# Altium PCB 400236.PcbDoc (part 5 of 7)
Units mm, origin at the board's own origin, x right, y up, seen from the top; angles counter-clockwise.
Board outline 136.53 x 63.5 mm, 4 copper layers (Top Layer, Mid-Layer 1, Mid-Layer 2, Bottom Layer), stack 1.49 mm thick; 344 components, 236 nets, 1364 pads, 1393 vias.
Unrouted connection lines stored in the file: 6.
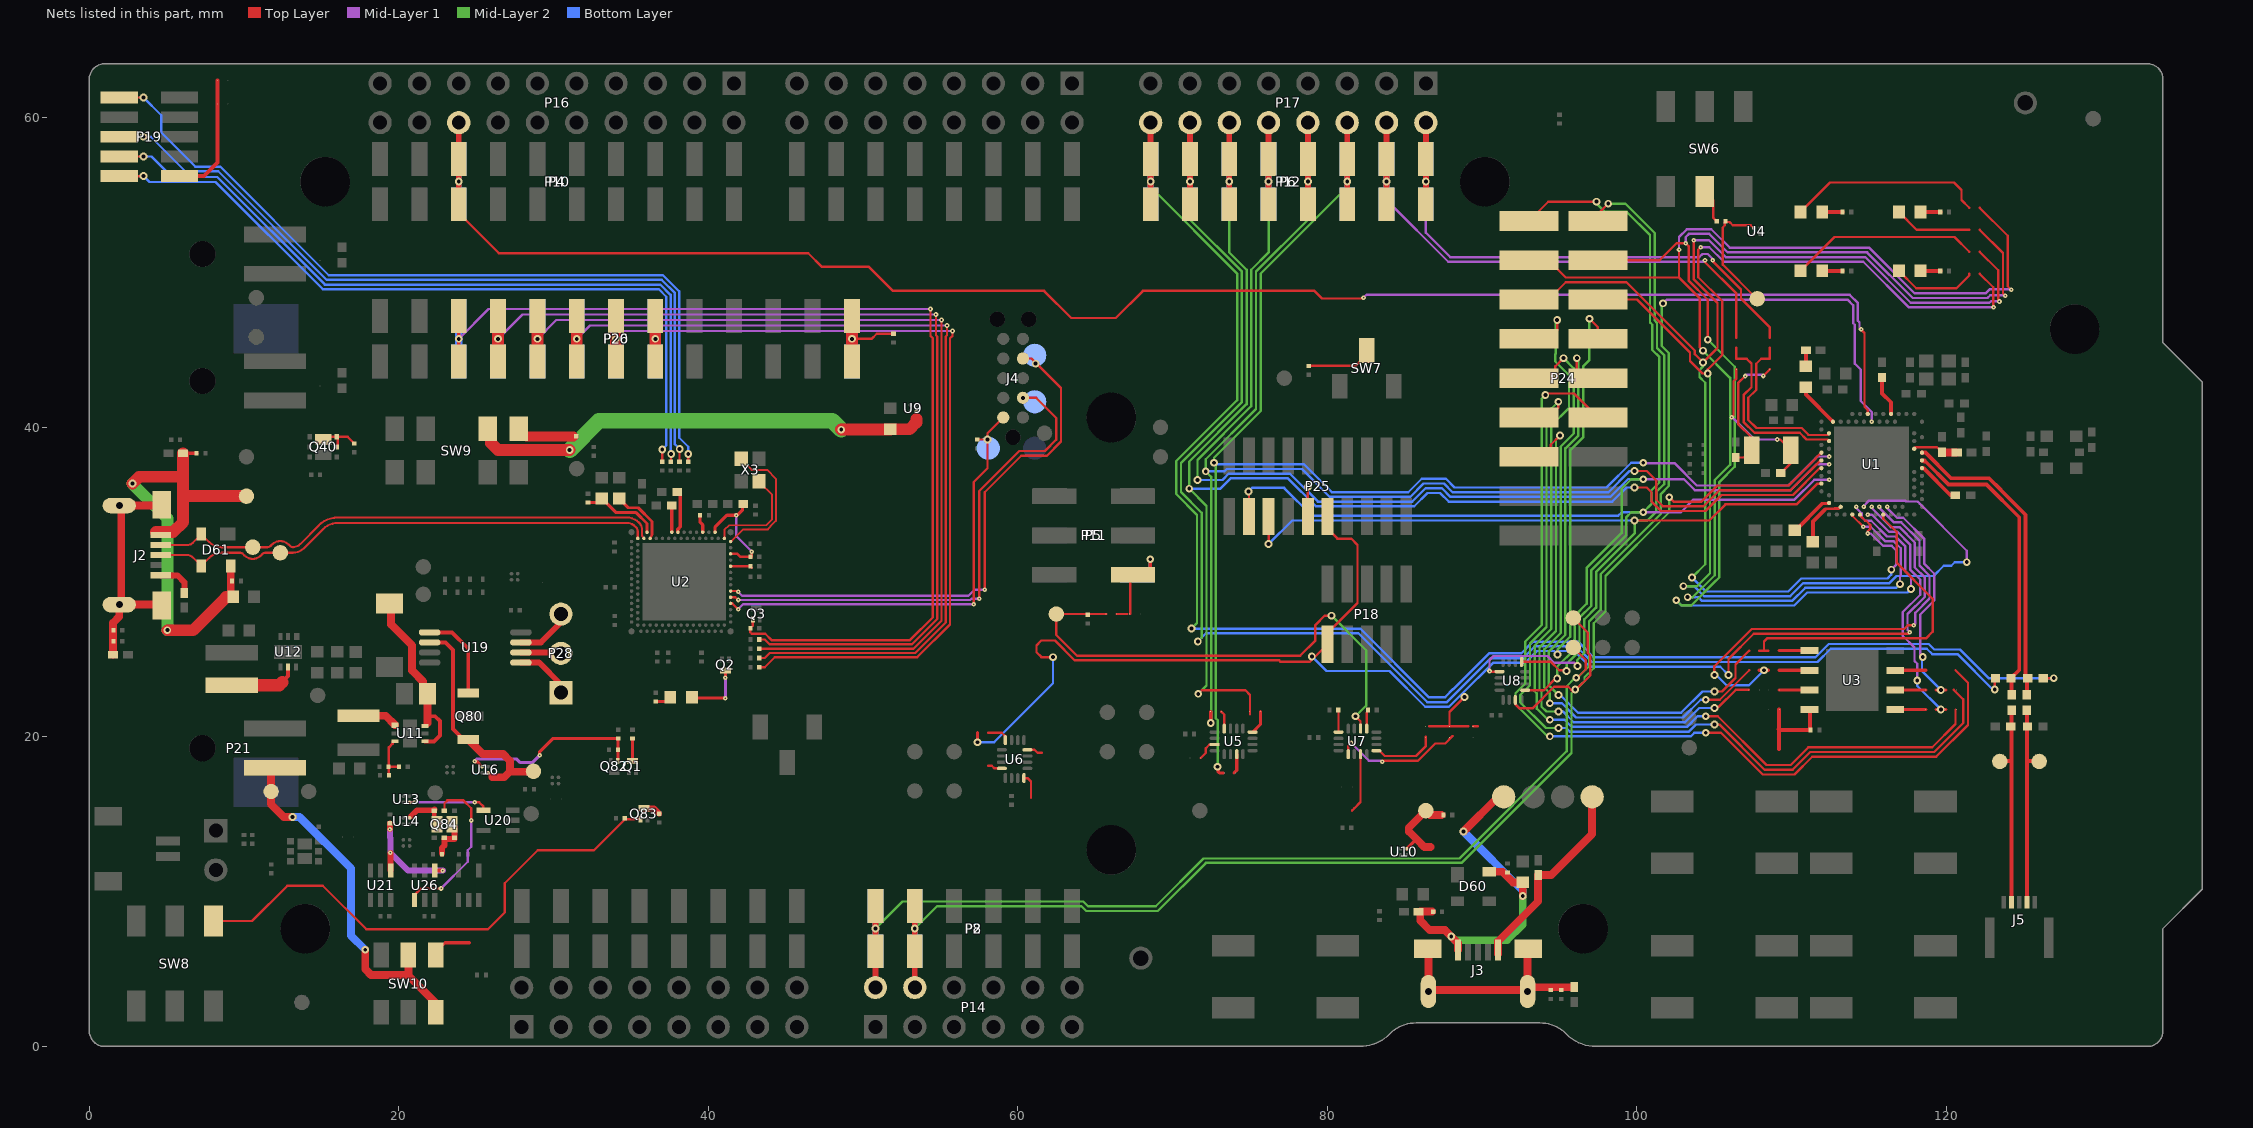
[diagram p5: the nets of this part, all layers, seen from the top]

## Via types
v1: diameter 0.5, hole 0.25, Top Layer to Bottom Layer, tented both sides, 1166 vias
v2: diameter 0.3, hole 0.1, Top Layer to Mid-Layer 1, tented top, 227 vias

## Nets (pads, with @x,y where several pads share a name; then routed paths per layer and width w, separated by ;. In a path a pad name is that pad's centre, name@x,y a point inside that pad or via, vN(x,y) a via of type N, cw(c..) or ccw(c..) an arc to the next point about the centre after c; other vN are vias at no path point) (continued)
IMCU_N: D61.2 J2.2 TP10.1 U2.B4 | length 33.6
  Top Layer w0.138: J2.2@4.619,32.398 6.34,32.398 ccw(c6.34,32.906) 6.699,32.546 D61.2@7.234,33.082 ; D61.2@7.244,33.099 7.248,33.095 7.754,32.59 ccw(c8.552,33.388) 8.552,32.259 11.506,32.259 ccw(c11.506,32.571) 11.727,32.35 11.811,32.434 cw(c12.344,31.901) 12.344,32.655 cw(c12.344,31.897) 12.88,32.433 12.964,32.349 ccw(c13.183,32.568) 13.163,32.259 ccw(c13.153,32.935) 13.631,32.457 14.84,33.666 ; 14.837,33.669 cw(c16.073,32.433) 16.063,34.181 ; U2.B4@35.839,32.827 35.839,32.877 35.714,33.002 35.714,33.379 ccw(c35.035,33.379) 35.515,33.859 ccw(c34.737,33.081) 34.737,34.181 16.073,34.181 ; 16.063,34.181 cw(c16.073,32.433) 16.073,34.181 ; 16.063,34.181 16.073,34.181
IMCU_P: D61.3 J2.3 TP9.1 U2.B2 | length 33.9
  Top Layer w0.138: J2.3@4.619,31.75 6.34,31.75 cw(c6.34,31.242) 6.699,31.601 D61.3@7.244,31.055 7.244,31.062 7.754,31.571 ; 35.275,33.6 ccw(c34.737,33.062) 34.737,33.823 16.063,33.823 ccw(c16.063,32.464) 15.112,33.435 ccw(c16.063,32.464) 15.107,33.43 15.102,33.425 13.884,32.207 cw(c13.147,32.944) 13.147,31.901 11.405,31.901 ccw(c11.405,31.589) 11.184,31.81 11.1,31.726 cw(c10.566,32.259) 10.566,31.505 cw(c10.566,32.263) 10.031,31.727 9.947,31.811 ccw(c9.728,31.592) 9.728,31.901 8.551,31.901 ; 35.276,33.6 35.344,33.532 cw(c35.115,33.303) 35.439,33.303 U2.B2@35.439,32.827 ; 7.754,31.571 cw(c8.551,30.773) 8.551,31.901 ; 7.754,31.571 cw(c8.551,30.773) 8.551,31.901
IMCU_RESET: J4.10 R8.1 TP50.1 U2.AC31 | length 29.6
  Top Layer w0.152: v2(41.925,28.25) U2.AC31@41.548,28.627 ; v2(57.15,28.575) 57.15,36.474 58.033,37.358 v1@58.033,39.218 ; R8.1@57.375,39.21 57.383,39.218 v1@58.033,39.218 ; J4.10@59.055,40.64 58.039,39.624 v1(58.039,39.218) v1@58.033,39.218 ; U2.AC31@41.548,28.627 U2.AC31@41.439,28.627 U2.AC31@41.548,28.627
  Mid-Layer 1 w0.152: v2(41.925,28.25) 42.245,28.57 57.145,28.57 v2(57.15,28.575)
IMCU_SWDCLK: J4.4 TP51.1 U2.W31 | length 36
  Top Layer w0.15: U2.W31@41.439,29.427 41.873,29.427 v2(41.925,29.375)
  Top Layer w0.152: v2(57.861,29.515) 57.861,35.814 60.219,38.172 61.874,38.172 62.786,39.084 62.786,42.547 60.884,44.45 J4.4@60.325,44.45
  Mid-Layer 1 w0.152: v2(41.925,29.375) 42.175,29.125 56.811,29.125 57.201,29.515 v2(57.861,29.515)
  other v1: 61.151,44.12
IMCU_SWDIO: J4.2 TP49.1 U2.AA31 | length 33.9
  Top Layer w0.125: U2.AA31@41.439,29.027 41.748,29.027 v2(41.925,28.85)
  Top Layer w0.15: U2.AA31@41.439,29.027 41.748,29.027
  Top Layer w0.152: v2(57.506,28.931) 57.506,35.89 60.092,38.476 61.751,38.476 62.484,39.209 62.484,40.604 61.178,41.91 v1(60.325,41.91)
  Mid-Layer 1 w0.152: v2(41.925,28.85) 41.927,28.848 56.926,28.848 57.005,28.926 57.026,28.926 57.033,28.933 57.504,28.933 v2(57.506,28.931)
N\R\F\_\O\N\L\Y\: R3.1 TP22.1 U4.B2 | length 8
  Top Layer w0.152: U4.B2@107.544,52.876 107.357,53.063 106.187,53.063 105.98,53.27 105.765,53.27 R3.1@105.72,53.315 105.676,53.27 105.676,53.055 105.537,52.916 105.537,50.516 107.743,48.311 TP22.1@107.772,48.311
NetC3_2: C3.2 L1.1 U1.H23 | length 2.9
  Top Layer w0.145: U1.H23@117.914,38.617 118.019,38.722 119.384,38.722 119.718,38.388 C3.2@119.723,38.383
  Top Layer w0.508: C3.2@119.718,38.388 L1.1@120.612,38.388
NetC9_1: C9.1 U1.N24 | length 2.9
  Top Layer w0.25: U1.N24@118.414,37.367 118.5,37.367 120.25,35.617 C9.1@120.564,35.617
NetC13_1: C13.1 U1.A18 | length 2.6
  Top Layer w0.25: C13.1@115.839,43.217 115.839,42.2 116.414,41.625 U1.A18@116.414,40.867
NetC17_2: C17.2 SB2.1 X2.1 | length 8.3
  Top Layer w0.152: C17.2@106.385,38.05 106.921,38.05 107.421,38.55 107.421,39.34 106.537,40.224 106.537,42.86 v2(106.995,43.317) ; v2@107.02,43.317 v2@107.045,43.291 ; v2(108.153,43.325) SB2.1@108.585,43.757
  Mid-Layer 1 w0.152: v2@107.104,43.401 108.077,43.401 v2(108.153,43.325)
NetC18_2: C18.2 SB1.1 X2.2 | length 9.6
  Top Layer w0.152: v2(106.121,40.665) 106.24,40.784 106.24,42.983 106.426,43.169 SB1.1@106.426,43.757 ; v2(109.068,39.218) 109.254,39.218 109.921,38.55 X2.2@109.921,38.525 109.921,37.675 C18.2@109.298,37.052
  Mid-Layer 1 w0.152: v2@106.147,40.665 107.594,39.218 v2(109.068,39.218)
NetC20_1: C20.1 U1.AC5 | length 3.6
  Top Layer w0.184: C20.1@111.354,32.614 C20.1@111.354,32.617 ; 112.062,34.608 112.202,34.747 112.254,34.747 112.258,34.743 112.749,34.743 112.755,34.749 113.045,34.749 U1.AC5@113.164,34.867
  Top Layer w0.254: C20.1@111.364,32.617 111.364,33.909 112.112,34.657
NetC29_2: C29.2 C30.1 U2.A27 U2.G31 | length 7.5
  Top Layer w0.152: U2.G31@41.439,31.827 41.875,31.827 42.05,31.652 42.804,31.652 v2(42.804,31.975)
  Top Layer w0.2: U2.A27@40.439,33.227 40.439,33.57 41.194,34.326 v2(41.814,34.326) 41.863,34.326 42.214,34.677 C29.2@42.214,35.077
  Mid-Layer 1 w0.152: v2(41.814,34.326) 41.814,32.965 v2(42.804,31.975)
NetC36_2: C36.2 U2.A15 | length 2.7
  Top Layer w0.225: C36.2@37.989,35.832 38.189,35.632 38.189,33.577 38.039,33.427 U2.A15@38.039,33.227
NetC37_1: C37.1 R13.2 U2.A5 | length 5.1
  Top Layer w0.15: U2.A5@36.039,33.227 U2.A5@36.064,33.252
  Top Layer w0.18: U2.A5@36.059,33.252 36.059,33.342
  Top Layer w0.2: R13.2@32.225,35.14 33.401,35.14 34.048,34.492 35.339,34.492 36.039,33.793 U2.A5@36.039,33.227
NetC38_1: C38.1 U2.B6 | length 3.9
  Top Layer w0.187: C38.1@34.239,35.402 34.83,34.811 35.471,34.811 36.37,33.912 36.37,33.101 ; C38.1@34.539,35.402 C38.1@34.539,35.407 ; U2.B6@36.239,32.827 36.37,33.097
NetC39_1: C39.1 U2.A23 | length 1.2
  Top Layer w0.2: C39.1@39.473,34.327 39.473,33.868 39.639,33.702 U2.A23@39.639,33.227
NetC40_2: C40.2 U2.A13 | length 1.7
  Top Layer w0.225: U2.A13@37.639,33.227 C40.2@37.639,34.925
NetC49_2: C49.2 SB16.2 SB17.2 SB18.2 U3.8 | length 6
  Top Layer w0.254: SB18.2@109.177,19.228 SB16.2@109.177,21.768 ; 109.177,20.523 109.151,20.498 109.202,20.447 C49.2@111.168,20.447 ; U3.8@111.149,21.768 111.168,21.749 C49.2@111.168,20.447 ; C49.2@111.184,20.447 C49.2@111.168,20.447
NetC53_2: C53.2 Q82.1 R5.2 U16.B2 | length 12.3
  Top Layer w0.203: v2(24.9,18.425) 24.928,18.397 25.062,18.397 U16.B2@25.378,18.082 ; v2(29.1,18.825) 29.1,19.05 29.94,19.89 R5.2@34.175,19.89 34.168,19.883 34.168,19.183 C53.2@34.16,19.175 34.155,19.17 34.155,18.455 Q82.1@34.15,18.45
  Mid-Layer 1 w0.203: v2(24.9,18.425) 25.041,18.566 27.634,18.566 27.859,18.341 28.616,18.341 v2(29.1,18.825)
NetC60_2: C60.2 C61.2 C62.2 D60.4 FB60.1 J3.1 TP15.1 | length 24.1
  Top Layer w0.508: C60.2@86.766,8.712 85.997,8.712 85.997,8.136 86.614,7.518 87.595,7.518 v1(88,7.113) 88.429,6.684 J3.1@88.429,6.232 ; v1(88.798,13.894) TP15.1@91.034,16.129 ; D60.4@90.452,11.29 91.301,11.29 91.987,10.603 C61.2@92.623,10.603 v1(92.623,9.728)
  Mid-Layer 2 w0.508: v1(88,7.113) 88.253,6.86 91.595,6.86 92.623,7.889 v1(92.623,9.728)
  Bottom Layer w0.508: v1(88.798,13.894) 92.623,10.069 v1(92.623,9.728)
NetC63_1: C63.1 C64.2 C65.2 D61.4 FB61.1 J2.1 TP11.1 | length 32.4
  Top Layer w0.254: FB61.1@6.063,38.329 C63.1@6.934,38.329
  Top Layer w0.508: C64.2@9.144,29.058 D61.4@9.144,31.055
  Top Layer w0.762: v1(2.794,36.373) 3.226,36.805 6.06,36.805 ; J2.1@4.318,33.233 5.41,33.233 6.06,33.884 6.06,35.56 ; v1(5.05,26.9) 6.707,26.9 8.846,29.039 9.291,29.039 9.297,29.045 C64.2@9.297,29.058 ; FB61.1@6.063,38.329 6.06,38.326 6.06,36.805 ; TP11.1@10.16,35.56 6.06,35.56 ; 6.06,35.56 6.06,36.805
  Mid-Layer 2 w0.762: v1(2.794,36.373) 5.05,34.117 v1(5.05,26.9)
NetC66_2: C66.2 FB64.1 J3.6@86.479,6.305 J3.6@86.529,3.557 J3.6@92.929,3.557 J3.6@92.979,6.305 R62.2 | length 14.9
  Top Layer w0.508: J3.6@86.427,3.653 J3.6@93.027,3.653 ; J3.6@86.479,6.305 86.529,6.255 J3.6@86.529,3.557 ; J3.6@92.929,3.557 92.929,6.255 J3.6@92.979,6.305 ; J3.6@93.029,3.303 J3.6@93.029,3.434 ; J3.6@93.331,3.83 FB64.1@95.942,3.83
NetC67_2: C67.2 FB65.1 J2.6@1.944,28.55 J2.6@1.944,34.95 J2.6@4.692,28.5 J2.6@4.692,35 R63.2 | length 15.1
  Top Layer w0.508: FB65.1@1.546,25.317 1.546,27.378 1.944,27.776 J2.6@1.944,28.45 ; J2.6@1.944,28.55 J2.6@4.521,28.55 ; J2.6@1.944,34.95 J2.6@4.521,34.95 ; J2.6@2.071,28.45 J2.6@2.071,35.05
NetC86_2: C86.2 D84.1 U11.4 U11.6 | length 11.7
  Top Layer w0.25: 21.856,21.184 21.857,21.182 21.871,21.168
  Top Layer w0.254: U11.4@21.701,19.718 22.284,19.718 22.657,20.091 22.657,21.031 22.352,21.336 21.857,21.336
  Top Layer w0.508: D84.1@19.507,28.618 19.507,27.268 20.862,25.914 20.862,24.288 21.561,23.589 21.561,23.08 C86.2@21.857,22.784 ; 21.857,20.906 21.857,21.182 21.857,21.336 C86.2@21.857,22.76
NetC87_1: C87.1 R82.1 R84.2 U11.3 | length 3.1
  Top Layer w0.152: R82.1@19.335,18.085 R82.1@19.36,18.085 ; C87.1@19.36,17.526 R82.1@19.36,18.085 ; U11.3@19.751,19.718 19.651,19.718 19.603,19.67 19.603,19.57 19.36,19.327 R82.1@19.36,18.085 ; R84.2@20.01,18.085 R82.1@19.36,18.085
NetC92_2: C92.2 SB81.2 SW9.7 U9.A2 | length 30.6
  Top Layer w0.26: 53.45,40.55 U9.A2@53.45,41.05
  Top Layer w0.762: SW9.7@25.749,39.906 25.968,39.687 25.968,38.978 26.414,38.532 v1(31.039,38.532) ; v1@48.576,39.863 50.282,39.863 50.301,39.863 50.35,39.863 C92.2@51.75,39.863 ; C92.2@51.769,39.875 53.004,39.875 53.45,40.321 53.45,40.55
  Mid-Layer 2 w1.016: v1(31.039,38.532) 32.94,40.433 48.009,40.433 v1(48.589,39.852)
NetFB62_1: FB62.1 J3.5 TP16.1 | length 13.2
  Top Layer w0.508: J3.5@91.029,5.978 91.029,6.803 93.614,9.387 FB62.1@93.614,11.083 94.457,11.083 97.104,13.73 TP16.1@97.104,16.129
NetFB63_1: FB63.1 J2.5 | length 2.4
  Top Layer w0.381: J2.5@4.619,30.45 4.628,30.44 5.704,30.44 6.147,29.997 FB63.1@6.147,29.304
NetL2_1: L2.1 L3.2 | length 1.1
  Top Layer w0.25: L2.1@110.914,43.942 L3.2@110.914,44.992
NetL2_2: L2.2 U1.B3 | length 2.9
  Top Layer w0.25: L2.2@110.914,42.592 110.914,42.117 U1.B3@112.664,40.367
NetL4_2: L4.2 U1.AB2 | length 3.1
  Top Layer w0.203: 111.957,35.063 111.98,35.087 112.383,35.087 U1.AB2@112.414,35.117
  Top Layer w0.25: L4.2@110.189,33.342 L4.2@110.236,33.342 ; L4.2@110.33,33.342 L4.2@110.236,33.342 ; 111.957,35.063 L4.2@110.236,33.342
NetL80_2: L80.2 U12.5 | length 3.6
  Top Layer w0.25: 12.596,23.672 12.85,23.926 U12.5@12.85,24.475
  Top Layer w0.8: L80.2@9.849,23.35 12.274,23.35 12.469,23.545
NetL81_1: L81.1 U11.1 | length 2.6
  Top Layer w0.508: L81.1@17.399,21.369 19.151,21.369 U11.1@19.751,20.768
NetLED1_1: LED1.1 SB5.2 | length 12.7
  Top Layer w0.152: LED1.1@110.575,53.917 112.48,55.822 120.479,55.822 120.965,55.337 120.965,54.696 SB5.2@121.464,54.197
NetLED1_2: LED1.2 R47.1 | length 1.3
  Top Layer w0.254: LED1.2@111.972,53.917 R47.1@113.274,53.917
NetLED2_1: LED2.1 SB6.2 | length 5
  Top Layer w0.152: LED2.1@116.925,53.917 118.067,52.774 120.968,52.774 SB6.2@121.464,52.774
NetLED2_2: LED2.2 R48.1 | length 1.3
  Top Layer w0.254: LED2.2@118.322,53.917 R48.1@119.599,53.917
NetLED3_1: LED3.1 SB7.2 | length 12.2
  Top Layer w0.152: LED3.1@110.575,50.107 112.766,52.299 120.517,52.299 SB7.2@121.464,51.352
NetLED3_2: LED3.2 R50.1 | length 1.3
  Top Layer w0.254: LED3.2@111.972,50.107 R50.1@113.274,50.107
NetLED4_1: LED4.1 SB8.2 | length 5.5
  Top Layer w0.152: LED4.1@116.925,50.107 118.042,48.99 120.643,48.99 121.464,49.81 SB8.2@121.464,49.93
NetLED4_2: LED4.2 R51.1 | length 1.3
  Top Layer w0.254: LED4.2@118.322,50.107 R51.1@119.599,50.107
NetLED5_1: LED5.1 Q2.3 | length 4
  Top Layer w0.2: LED5.1@38.938,22.575 39.002,22.51 v2@41.09,22.51 ; v2(41.1,23.825) Q2.3@41.1,24.3
  Mid-Layer 1 w0.2: v2@41.09,22.5 v2(41.1,22.51) v2(41.1,23.825)
NetLED5_2: LED5.2 R7.1 | length 1.1
  Top Layer w0.2: R7.1@36.6,22.29 37.256,22.29 LED5.2@37.541,22.575
NetP5_6: P5.6 P11.6 SB32.2 SB33.1 | length 5.2
  Top Layer w0.152: SB33.1@66.378,27.94 67.077,27.94 ; P5.6@67.119,30.48 67.252,30.348 67.252,28.293 67.252,27.94
  Top Layer w0.254: P5.6@68.555,30.531 v1(68.555,31.481)
  Bottom Layer w0.254: P11.6@68.555,30.531 v1(68.555,31.481)
NetP6_7: P6.7 P12.7 P17.14 R43.1 | length 99.3
  Top Layer w0.152: v1(123.114,23.063) 123.114,23.745 R43.1@123.169,23.8
  Top Layer w0.381: P6.7@71.12,54.415 v1(71.12,55.88) P6.7@71.12,57.345 P17.14@71.12,59.69
  Mid-Layer 2 w0.152: v1(71.12,55.88) 71.12,53.417 74.473,50.064 74.473,41.631 70.536,37.694 70.536,35.822 71.882,34.475 71.882,26.416 v1(71.628,26.162)
  Bottom Layer w0.152: v1(71.628,26.162) 72.161,26.695 82,26.695 86.445,22.25 87.729,22.25 90.571,25.092 92.648,25.092 93.413,25.857 96.073,25.857 97.089,24.841 111.658,24.841 ; 111.658,24.845 112.518,25.704 118.721,25.704 119.075,25.349 120.701,25.349 122.987,23.063 v1(123.114,23.063)
  Bottom Layer w0.381: P12.7@71.12,54.415 v1(71.12,55.88) P12.7@71.12,57.345
NetP6_8: P6.8 P12.8 P17.16 R45.1 | length 102.9
  Top Layer w0.152: R45.1@126.251,23.8 v1(126.928,23.8)
  Top Layer w0.381: P6.8@68.58,54.415 v1(68.58,55.88) P6.8@68.58,57.345 P17.16@68.58,59.69
  Mid-Layer 2 w0.152: v1(68.58,55.88) 68.58,55.526 74.168,49.938 74.168,41.758 70.231,37.821 70.231,35.695 71.577,34.349 71.577,27.356 v1(71.222,27)
  Bottom Layer w0.152: v1@71.425,27 82.126,27 86.571,22.555 87.603,22.555 87.63,22.582 87.63,22.598 88.121,23.089 88.137,23.089 90.445,25.397 92.521,25.397 93.287,26.162 96.196,26.162 97.212,25.146 111.532,25.146 112.392,26.006 118.849,26.006 119.201,25.654 120.861,25.654 122.715,23.8 v1(126.928,23.8)
  Bottom Layer w0.381: P12.8@68.58,54.415 v1(68.58,55.88) P12.8@68.58,57.345
NetP19_1: P19.1 SB19.1 SB47.2 | length 8.1
  Top Layer w0.254: P19.1@5.836,56.236 7.411,56.236 8.298,57.123 8.298,60.65 8.298,62.408
NetP19_2: P19.2 R11.2 | length 49.4
  Top Layer w0.152: P19.2@1.936,56.236 v1(3.505,56.236) ; R11.2@37.021,37.779 37.021,38.571 v1(37.025,38.575)
  Bottom Layer w0.152: v1(3.505,56.236) 3.886,55.855 8.164,55.855 15.098,48.92 36.812,48.92 37.287,48.446 37.287,38.837 v1(37.025,38.575)
NetP19_4: P19.4 R12.2 | length 50.1
  Top Layer w0.152: P19.4@1.936,57.506 v1(3.505,57.506) ; R12.2@37.579,37.779 37.59,37.79 37.59,38.265 v1(37.6,38.275)
  Bottom Layer w0.152: v1(3.505,57.506) 4.025,57.506 5.349,56.181 8.268,56.181 15.224,49.225 36.9,49.225 37.565,48.56 37.565,38.31 v1(37.6,38.275)
NetP19_6: P19.6 R14.2 | length 51.1
  Top Layer w0.152: P19.6@1.936,58.776 v1(3.505,58.776) ; R14.2@38.138,37.779 v1@38.138,38.598
  Bottom Layer w0.152: v1(3.505,58.776) 3.975,58.776 6.204,56.547 8.334,56.547 15.351,49.53 36.987,49.53 37.842,48.675 37.842,38.905 v1(38.148,38.598)
NetP19_10: P19.10 R15.2 | length 53.3
  Top Layer w0.152: P19.10@1.936,61.316 v1(3.505,61.316) ; R15.2@38.697,37.779 38.701,37.783 38.7,37.785 v1(38.7,38.275)
  Bottom Layer w0.152: v1(3.505,61.316) 4.65,60.17 4.65,59.05 6.85,56.85 8.462,56.85 15.477,49.835 37.075,49.835 38.119,48.79 38.119,39.331 38.7,38.75 v1(38.7,38.275)
NetP20_3: P20.3 P26.3 Q3.1 R20.1 | length 73.6
  Top Layer w0.152: P20.3@23.876,44.255 P20.3@23.876,47.185 ; Q3.1@42.875,27.6 42.875,27.185 R20.1@42.715,27.025 42.715,26.76 42.813,26.663 43.68,26.663 44.087,26.255 53.03,26.255 54.51,27.735 54.51,45.757 54.353,45.913 v2(54.353,47.65)
  Top Layer w0.254: P20.3@23.876,44.255 v1(23.876,45.72) P20.3@23.876,47.185
  Mid-Layer 1 w0.152: v1(23.876,45.72) 25.806,47.65 v2(54.353,47.65)
  Bottom Layer w0.508: P26.3@23.876,44.255 v1(23.876,45.72) P26.3@23.876,47.185
NetP20_4: P20.4 P26.4 R16.2 | length 66.8
  Top Layer w0.152: R16.2@43.285,26.3 43.65,26.3 43.973,25.977 53.145,25.977 54.787,27.62 54.787,45.872 54.709,45.95 v2(54.709,47.295)
  Top Layer w0.762: P20.4@26.416,44.255 v1(26.416,45.72) P20.4@26.416,47.185
  Mid-Layer 1 w0.152: v1(26.416,45.72) 27.991,47.295 v2(54.709,47.295)
  Bottom Layer w0.508: P26.4@26.416,44.255 v1(26.416,45.72) P26.4@26.416,47.185
NetP20_5: P20.5 P26.5 R17.2 | length 64.4
  Top Layer w0.152: R17.2@43.285,25.7 53.26,25.7 55.064,27.505 v2(55.064,46.939)
  Top Layer w0.762: P20.5@28.956,44.255 v1(28.956,45.72) P20.5@28.956,47.185
  Mid-Layer 1 w0.152: v1(28.956,45.72) 30.175,46.939 v2(55.064,46.939)
  Bottom Layer w0.508: P26.5@28.956,44.255 v1(28.956,45.72) P26.5@28.956,47.185
NetP20_6: P20.6 P26.6 R18.2 | length 62.4
  Top Layer w0.152: R18.2@43.285,25.1 43.65,25.1 43.973,25.423 53.375,25.423 55.342,27.39 55.342,45.872 55.42,45.95 v2(55.42,46.584)
  Top Layer w0.762: P20.6@31.496,44.255 v1(31.496,45.72) P20.6@31.496,47.185
  Mid-Layer 1 w0.152: v1(31.496,45.72) 32.36,46.584 v2(55.42,46.584)
  Bottom Layer w0.508: P26.6@31.496,44.255 v1(31.496,45.72) P26.6@31.496,47.185
NetP20_7: P20.7 P26.7 R19.2 | length 60.3
  Top Layer w0.152: R19.2@43.285,24.5 43.65,24.5 44.295,25.145 53.489,25.145 55.619,27.275 55.619,45.757 55.776,45.913 v2(55.776,46.228)
  Top Layer w0.762: P20.7@34.036,44.255 v1(34.036,45.72) P20.7@34.036,47.185
  Mid-Layer 1 w0.152: v1(34.036,45.72) 34.544,46.228 v2(55.776,46.228)
  Bottom Layer w0.508: P26.7@34.036,44.255 v1(34.036,45.72) P26.7@34.036,47.185
NetP20_8: P20.8 P26.8 | length 5.9
  Top Layer w0.762: P20.8@36.576,44.255 v1(36.576,45.72) P20.8@36.576,47.185
  Bottom Layer w0.508: P26.8@36.576,44.255 v1(36.576,45.72) P26.8@36.576,47.185
NetP20_13: P20.13 P26.13 R69.2 | length 11.6
  Top Layer w0.152: P20.13@49.276,44.255 v1(49.276,45.72) ; P20.13@49.276,47.185 v1(49.276,45.72) ; R69.2@51.968,46.056 50.882,46.056 50.546,45.72 v1(49.276,45.72)
  Top Layer w0.762: P20.13@49.276,44.255 v1(49.276,45.72) P20.13@49.276,47.185
  Bottom Layer w0.508: P26.13@49.276,44.255 v1(49.276,45.72) P26.13@49.276,47.185
NetP21_2: P21.2 SW10.2 SW10.4 TP27.1 | length 23.5
  Top Layer w0.508: P21.2@11.811,18.009 11.75,17.948 TP27.1@11.75,16.475 11.75,15.65 12.566,14.834 v1(13.132,14.834) ; v1(17.831,6.248) 17.831,5.004 18.212,4.623 20.574,4.623 ; SW10.2@20.625,5.914 20.625,4.674 20.574,4.623 ; SW10.4@22.375,2.214 22.375,2.822 20.574,4.623
  Bottom Layer w0.508: v1(13.132,14.834) 13.591,14.834 16.916,11.509 16.916,7.163 v1(17.831,6.248)
NetP24_7: P24.7 SB23.2 | length 60.4
  Top Layer w0.152: P24.7@93.027,45.72 94.285,45.72 94.844,46.279 v1(94.844,46.939) ; v1(104.445,21.336) 105.225,21.336 108.374,18.186 109.932,18.186 111.075,19.329 119.076,19.329 120.581,20.835 120.581,21.768
  Mid-Layer 2 w0.152: v1(94.369,21.107) 94.251,21.107 93.531,21.827 93.531,22.811 93.396,22.947 93.396,25.909 94.463,26.976 94.463,40.107 95.606,41.25 95.606,43.365 94.717,44.254 94.717,44.722 94.742,44.747 94.742,46.838 v1(94.844,46.939)
  Bottom Layer w0.152: v1(94.369,21.107) 95.327,21.107 95.784,20.65 103.231,20.65 103.917,21.336 v1(104.445,21.336)
NetP24_9: P24.9 SB21.2 | length 40.9
  Top Layer w0.152: P24.9@93.027,43.18 94.17,43.18 94.729,43.739 94.729,43.954 v1(95.25,44.475) ; v1(104.445,22.403) 105.352,22.403 107.257,24.308
  Mid-Layer 2 w0.152: v1(94.369,22.174) 94.369,22.835 94.005,23.199 94.005,25.656 95.072,26.723 95.072,38.768 95.91,39.606 95.91,43.815 v1(95.25,44.475)
  Bottom Layer w0.152: v1(94.369,22.174) 95.149,22.174 96.064,21.26 102.979,21.26 104.122,22.403 v1(104.445,22.403)
NetP24_10: P24.10 SB22.2 | length 40.2
  Top Layer w0.152: v1(96.114,44.475) 96.114,43.739 96.672,43.18 P24.10@97.472,43.18 ; v1(105.004,22.936) 105.493,22.936 106.369,23.813 106.369,24.69 107.257,25.578
  Mid-Layer 2 w0.152: v1(94.928,22.708) 94.31,23.326 94.31,25.53 95.377,26.597 95.377,38.642 96.215,39.48 96.215,44.374 v1(96.114,44.475)
  Bottom Layer w0.152: v1(94.928,22.708) 95.047,22.708 96.19,21.565 102.852,21.565 104.224,22.936 v1(105.004,22.936)
NetP24_11: P24.11 SB24.2 | length 57.4
  Top Layer w0.152: P24.11@93.027,40.64 94.297,40.64 94.916,41.258 94.916,41.652 v1(94.92,41.656) ; v1(105.004,20.803) 105.327,20.803 108.248,17.882 110.058,17.882 111.201,19.025 119.202,19.025 121.085,20.907 121.085,22.425 120.472,23.038
  Mid-Layer 2 w0.152: v1(94.92,41.656) 94.158,40.894 94.158,27.102 93.091,26.035 93.091,23.335 92.456,22.7 92.456,22.233 94.115,20.574 v1(94.928,20.574)
  Bottom Layer w0.152: v1(94.928,20.574) 95.429,20.574 95.658,20.345 103.357,20.345 103.814,20.803 v1(105.004,20.803)
NetP24_12: P24.12 SB25.2 | length 61.3
  Top Layer w0.152: v1(94.082,42.088) 94.183,42.189 95.923,42.189 P24.12@97.472,40.64 ; v1(104.445,20.269) 105.429,20.269 108.122,17.577 110.184,17.577 111.327,18.72 119.329,18.72 121.389,20.78 121.389,23.5 120.581,24.308
  Mid-Layer 2 w0.152: v1(94.082,42.088) 93.853,41.859 93.853,27.229 92.786,26.162 92.786,23.461 92.151,22.826 92.151,22.106 94.217,20.041 v1(94.369,20.041)
  Bottom Layer w0.152: v1(94.369,20.041) 103.484,20.041 103.712,20.269 v1(104.445,20.269)
NetP24_13: P24.13 SB20.2 | length 35.5
  Top Layer w0.152: P24.13@93.027,38.1 93.865,38.1 94.424,38.659 94.424,38.874 v1(95.021,39.472) ; v1(105.004,21.869) 105.07,21.936 105.277,21.936 106.379,23.038 SB20.2@107.219,23.038
  Mid-Layer 2 w0.152: v1(94.928,21.641) 94.148,21.641 93.836,21.953 93.836,22.938 93.701,23.073 93.701,25.782 94.767,26.849 94.767,39.218 v1(95.021,39.472)
  Bottom Layer w0.152: v1(94.928,21.641) 95.225,21.641 95.91,20.955 103.105,20.955 104.019,21.869 v1(105.004,21.869)
NetP28_1: P28.1 U19.5 | length 3.7
  Top Layer w0.381: U19.5@27.893,24.806 29.067,24.806 30.48,23.393 P28.1@30.48,22.86
NetP28_2: P28.2 U19.6 | length 2.6
  Top Layer w0.381: U19.6@27.893,25.456 30.424,25.456 P28.2@30.48,25.4
NetP28_3: P28.3 U19.7 | length 3.7
  Top Layer w0.381: U19.7@27.893,26.106 29.179,26.106 30.48,27.407 P28.3@30.48,27.94
NetQ1_3: Q1.3 R6.1 | length 1.4
  Top Layer w0.203: Q1.3@35.1,18.45 R6.1@35.1,19.89
NetQ40_5: Q40.5 Q40.6 R41.2 | length 2.9
  Top Layer w0.152: Q40.6@15.113,39.21 15.288,39.385 Q40.6@16.058,39.385 ; Q40.5@16.063,38.735 16.063,39.385 16.704,39.385 17.046,39.043 17.046,39.028 17.105,38.969 R41.2@17.12,38.969
NetQ80_1: Q80.1 U19.1 | length 5.6
  Top Layer w0.254: U19.1@22.196,26.756 23.434,26.756 24.489,25.701 Q80.1@24.489,22.836
NetQ80_3: Q80.3 TP34.1 U16.A1 U19.2 | length 15
  Top Layer w0.25: U16.A1@25.778,17.682 26.065,17.394
  Top Layer w0.254: U19.2@22.196,26.106 23.018,26.106 23.51,25.614 23.51,20.509 24.182,19.836 Q80.3@24.489,19.836
  Top Layer w0.508: Q80.3@24.489,19.836 25.427,18.898 26.746,18.898 27.178,18.466 27.178,17.755 ; 26.065,17.394 26.818,17.394 27.178,17.755 ; TP34.1@28.651,17.856 28.55,17.755 27.178,17.755
NetQ83_1: Q83.1 R94.1 SW8.4 | length 33.7
  Top Layer w0.152: SW8.4@8.028,8.109 10.522,8.109 12.802,10.389 15.088,10.389 17.907,7.569 25.756,7.569 26.851,8.664 26.851,10.544 28.981,12.675 32.604,12.675 34.616,14.687 Q83.1@35.614,14.687
NetQ83_3: Q83.3 R93.2 | length 1.1
  Top Layer w0.381: Q83.3@35.839,15.387 36.486,15.387 R93.2@36.83,15.042
NetQ84_2: Q84.2 U26.4 | length 10.6
  Top Layer w0.152: U26.4@21.016,9.464 21.016,9.789 21.438,10.211 v2(22.733,10.211) ; Q84.2@22.951,15.301 22.951,15.712 23.139,15.9 24.181,15.9 24.689,15.392 v2(24.689,14.605)
  Mid-Layer 1 w0.152: v2(22.733,10.211) 24.46,11.938 24.46,12.675 24.689,12.903 v2(24.689,14.605)
NetQ84_3: Q84.3 U14.A2 | length 2.7
  Top Layer w0.305: Q84.3@22.301,15.301 22.301,14.531 Q84.3@22.476,14.356
  Top Layer w0.381: U14.A2@20.764,14.846 21.184,15.265 22.265,15.265 Q84.3@22.301,15.301
NetQ84_5: Q84.5 Q84.6 R96.2 | length 2.7
  Top Layer w0.381: R96.2@22.789,12.471 22.789,12.833 22.951,12.994 22.951,13.411 23.601,13.411 23.601,14.181 Q84.6@23.426,14.356
NetR3_2: R3.2 SW6.5 | length 2.3
  Top Layer w0.152: SW6.5@104.369,55.238 104.935,54.671 104.935,53.53 105.077,53.388 105.092,53.388 105.15,53.33 R3.2@105.15,53.315
NetR4_2: R4.2 SW7.2 | length 4.3
  Top Layer w0.152: R4.2@78.791,43.973 78.811,43.994 81.84,43.994 82.55,44.704 SW7.2@82.55,44.965
NetR9_1: R9.1 U2.L31 | length 1.4
  Top Layer w0.152: U2.L31@41.439,31.027 42.718,31.027 R9.1@42.804,30.941
NetR52_2: R52.2 U7.9 | length 1.2
  Top Layer w0.152: U7.9@82.54,20.535 82.54,21.579 82.562,21.601 82.562,21.684 R52.2@82.621,21.742
NetR53_2: R53.2 U7.13 | length 1.5
  Top Layer w0.152: R53.2@80.701,21.742 R53.2@80.715,21.728 ; U7.13@80.715,20.31 R53.2@80.715,21.728 ; R53.2@80.715,21.768 R53.2@80.715,21.728
NetR68_1: R68.1 SB33.2 TP19.1 U7.10 | length 33.2
  Top Layer w0.152: SB33.2@65.702,27.94 64.524,27.94 64.516,27.932 64.508,27.94 TP19.1@62.484,27.94 62.484,26.594 63.828,25.25 78.234,25.25 79.223,26.238 79.223,27.229 79.832,27.838 v1(80.264,27.838) ; v1(81.813,21.336) 82.14,21.009 U7.10@82.14,20.535
  Mid-Layer 2 w0.152: v1(80.264,27.838) 82.499,25.604 82.499,22.021 v1(81.813,21.336)
NetR95_2: R95.2 U21.1 U26.1 | length 7.5
  Top Layer w0.254: v2(19.456,12.522) v2@19.471,12.507 ; U26.1@22.316,11.364 v2(22.85,11.364)
  Top Layer w0.381: v2(19.431,14.046) R95.2@19.431,14.422 ; U21.1@19.471,11.364 v2@19.471,12.507
  Mid-Layer 1 w0.381: v2(19.431,14.046) 19.431,13.502 19.456,13.476 v2(19.456,12.522) 20.615,11.364 v2(22.85,11.364)
NetR97_2: R97.2 SW9.8 | length 3.7
  Top Layer w0.635: SW9.8@27.749,39.906 28.235,39.421 31.293,39.421
NetR98_1: R98.1 SB80.1 TP38.1 U10.A1 | length 5.6
  Top Layer w0.2: 85.7,13.35 85.725,13.35 85.763,13.388
  Top Layer w0.203: U10.A1@85.125,12.775 85.7,13.35
  Top Layer w0.508: TP38.1@86.614,14.986 TP38.1@86.36,15.24 85.253,14.133 85.253,13.898 85.763,13.388 86.272,12.878 86.656,12.878 ; TP38.1@86.639,14.961 R98.1@87.376,14.961
NetSB10_2: SB10.2 U3.7 | length 2
  Top Layer w0.203: SB10.2@109.177,23.038 U3.7@111.149,23.038
NetSB11_2: SB11.2 U3.6 | length 2
  Top Layer w0.203: SB11.2@109.177,24.308 U3.6@111.149,24.308
NetSB12_2: SB12.2 U3.5 | length 2
  Top Layer w0.203: SB12.2@109.177,25.578 U3.5@111.149,25.578
NetSB13_2: SB13.2 U3.1 | length 2
  Top Layer w0.203: U3.1@116.689,21.768 SB13.2@118.661,21.768
NetSB14_2: SB14.2 U3.2 | length 2
  Top Layer w0.203: U3.2@116.689,23.038 SB14.2@118.661,23.038
NetSB15_2: SB15.2 U3.3 | length 2
  Top Layer w0.203: U3.3@116.689,24.308 SB15.2@118.661,24.308
NetSB42_1: SB42.1 U7.1 | length 8.6
  Top Layer w0.152: U7.1@81.34,18.885 81.34,19.415 v2(81.534,19.609) ; v2(83.541,18.39) 83.617,18.466 85.851,18.466 86.965,19.58 87.608,19.58 88.087,20.058
  Mid-Layer 1 w0.152: v2(81.534,19.609) 82.677,18.466 83.464,18.466 v2(83.541,18.39)
NetSB45_1: SB45.1 U7.5 | length 4.2
  Top Layer w0.152: U7.5@83.165,19.11 83.361,19.11 83.701,18.771 85.725,18.771 86.36,19.406 86.36,19.833 86.36,20.008
NetSB46_1: SB46.1 U7.3 | length 3.9
  Top Layer w0.152: 81.592,15.24 81.741,15.389 82.14,15.788 U7.3@82.14,18.885
NetSB50_2: SB50.2 U5.15 | length 1.4
  Top Layer w0.125: U5.15@72.696,19.492 U5.15@72.714,19.51
  Top Layer w0.152: SB50.2@71.813,18.644 72.137,18.968 72.137,19.262 72.367,19.492 U5.15@72.696,19.492
NetSB51_2: SB51.2 U5.3 | length 1.3
  Top Layer w0.203: 73.963,17.675 74.139,17.852 U5.3@74.139,18.885
NetSB52_2: SB52.2 U5.8 | length 1.6
  Top Layer w0.152: U5.8@75.157,20.307 U5.8@75.164,20.314
  Top Layer w0.203: U5.8@75.164,20.31 75.164,20.314 75.674,20.824 SB52.2@75.674,21.641
NetSB53_2: SB53.2 U5.12 | length 1.2
  Top Layer w0.152: SB53.2@73.134,21.641 73.332,21.443 U5.12@73.332,20.532
NetSB54_2: SB54.2 U6.16 | length 1.6
  Top Layer w0.152: U6.16@60.392,17.342 60.628,17.342 60.851,17.119 SB54.2@60.851,16.078
NetSB55_2: SB55.2 U6.4 | length 1
  Top Layer w0.152: U6.4@60.617,19.167 61.071,19.167 61.265,18.974 SB55.2@61.562,18.974
NetSB56_2: SB56.2 U6.8 | length 1.5
  Top Layer w0.152: SB56.2@58.072,20.269 58.953,20.269 59.192,20.031 U6.8@59.192,19.792
NetSB57_2: SB57.2 U6.12 | length 1
  Top Layer w0.152: SB57.2@58.072,18.136 58.318,18.136 58.487,17.967 U6.12@58.967,17.967 U6.12@58.967,17.937
NetSB58_2: SB58.2 SW10.1 | length 2.6
  Top Layer w0.203: SW10.1@22.375,5.914 22.375,6.093 22.987,6.706 SB58.2@24.58,6.706
NetU2_B30: U2.B30 X3.3 | length 6.7
  Top Layer w0.125: U2.B30@41.039,32.827 41.039,33.375 41.341,33.677 43.735,33.677 44.117,34.058 44.117,35.633 43.312,36.438 X3.3@43.275,36.475
NetU2_C31: U2.C31 X3.1 | length 9
  Top Layer w0.125: U2.C31@41.439,32.627 41.463,32.627 42.251,33.414 43.846,33.414 44.016,33.584 44.016,33.604 44.367,33.955 44.367,36.683 43.8,37.25 42.8,37.25 42.125,37.925 X3.1@42.125,37.975
NetU13_B2: U13.B2 U20.4 | length 5.1
  Top Layer w0.152: U13.B2@20.698,15.777 20.699,15.775 21.033,15.775 v2(21.034,15.774) ; v2(24.917,15.774) 24.92,15.777 25.194,15.777 25.466,15.504 U20.4@25.466,15.255
  Mid-Layer 1 w0.152: v2(21.034,15.774) v2(24.917,15.774)
NFC1: C46.1 J5.2 R44.1 TP17.1 | length 12.9
  Top Layer w0.25: TP17.1@123.479,18.44 124.198,18.44 ; J5.2@124.198,9.328 124.198,18.44 ; R44.1@124.198,21.463 124.198,18.44
NFC2: C47.2 J5.4 R46.1 TP18.1 | length 12.8
  Top Layer w0.25: J5.4@125.198,9.328 125.198,18.44 ; R46.1@125.198,21.463 125.198,18.44 ; TP18.1@125.909,18.44 125.198,18.44
P0.00: P6.1 P12.1 P17.2 SB4.2 | length 37.6
  Top Layer w0.152: v2@104.851,50.775 106.723,48.902 106.723,48.318 108.585,46.457 108.585,45.953 108.585,45.778
  Top Layer w0.381: P6.1@86.36,54.415 v1(86.36,55.88) P6.1@86.36,57.345 P17.2@86.36,59.69
  Mid-Layer 1 w0.152: v1(86.36,55.88) 86.36,52.577 87.934,51.003 104.026,51.003 104.227,51.204 104.578,51.204 104.902,50.879 v2(104.902,50.8) ; v2@104.851,50.775 v2@104.851,50.8
  Bottom Layer w0.381: P12.1@86.36,54.415 v1(86.36,55.88) P12.1@86.36,57.345
P0.00/XL1: SB2.2 SB4.1 U1.D2 | length 11.2
  Top Layer w0.145: 111.1,39.512 112.309,39.512 U1.D2@112.414,39.617
  Top Layer w0.152: 108.585,45.154 108.585,44.432 108.029,44.432 107.703,44.107 107.703,42.418 107.195,41.91 107.195,40.479 107.716,39.958 110.642,39.958 111.077,39.523
P0.01: P6.2 P12.2 P17.4 SB3.2 | length 37.4
  Top Layer w0.152: v2(104.394,50.8) 104.394,50.673 106.426,48.641 106.426,45.953 106.426,45.778
  Top Layer w0.381: P6.2@83.82,54.415 v1(83.82,55.88) P6.2@83.82,57.345 P17.4@83.82,59.69
  Mid-Layer 1 w0.152: v1(83.82,55.88) 83.82,54.686 87.808,50.698 v2@104.318,50.698
  Bottom Layer w0.381: P12.2@83.82,54.415 v1(83.82,55.88) P12.2@83.82,57.345
P0.01/XL2: SB1.2 SB3.1 U1.F2 | length 11.9
  Top Layer w0.145: 110.922,39.222 112.309,39.222 U1.F2@112.414,39.117
  Top Layer w0.152: 106.426,45.154 106.426,44.432 107.086,44.432 107.399,44.12 107.399,42.596 106.891,42.088 106.891,40.353 107.59,39.654 110.516,39.654 110.922,39.248 110.922,39.222
P0.02/AIN0: P4.8 P10.8 P16.16 U1.A12 | length 111.2
  Top Layer w0.152: P4.8@23.876,54.415 23.876,53.848 26.467,51.257 46.455,51.257 47.344,50.368 50.375,50.368 51.924,48.819 61.694,48.819 63.447,47.066 66.326,47.066 68.079,48.819 79.164,48.819 79.65,48.332 82.289,48.332 v2(82.333,48.376) ; v2(114.478,46.33) 114.702,46.106 114.702,41.33 114.914,41.119 U1.A12@114.914,40.867
  Top Layer w0.381: P4.8@23.876,54.415 v1(23.876,55.88) P4.8@23.876,57.345 P16.16@23.876,59.69
  Mid-Layer 1 w0.152: v2(82.333,48.376) 82.522,48.565 113.741,48.565 114.275,48.031 114.275,46.886 114.374,46.786 114.374,46.434 v2(114.478,46.33)
  Bottom Layer w0.381: P10.8@23.876,53.848 v1(23.876,55.88) P10.8@23.876,57.345
P0.03/AIN1: P2.1 P8.1 P14.2 TP42.1 U1.B13 | length 113.6
  Top Layer w0.152: TP42.1@95.885,25.781 96.69,24.976 96.69,24.369 96.146,23.825 v1(96.081,23.825)
  Top Layer w0.381: P14.2@50.8,3.81 P2.1@50.8,6.155 v1(50.8,7.62) P2.1@50.8,9.085
  Mid-Layer 1 w0.152: v1(101.676,48.014) 101.92,48.258 113.592,48.258 113.97,47.88 113.97,46.724 114.071,46.622 114.071,44.119 114.456,43.735 114.456,41.706 115.164,40.998 v2(115.164,40.367)
  Mid-Layer 2 w0.152: v1(50.8,7.62) 52.553,9.373 64.226,9.373 64.541,9.057 68.912,9.057 72.003,12.149 88.527,12.149 95.462,19.084 95.462,23.275 95.974,23.787 96.119,23.787 96.901,24.569 96.901,27.467 97.663,28.229 97.663,30.532 101.244,34.113 101.244,34.116 101.542,34.414 101.542,35.687 101.552,35.697 101.552,35.704 102.057,36.209 102.057,44.799 101.6,45.256 101.6,47.937 v1(101.676,48.014)
  Bottom Layer w0.381: P8.1@50.8,6.155 v1(50.8,7.62) P8.1@50.8,9.677
P0.04/AIN2: P2.2 P8.2 P14.4 TP43.1 U1.J1 U8.15 | length 96.4
  Top Layer w0.15: U1.J1@111.86,38.319 U1.J1@111.908,38.367
  Top Layer w0.152: U8.15@92.148,22.397 92.148,22.101 92.406,21.843 93.243,21.843 94.64,23.241 95.555,23.241 v1@95.872,22.924 ; TP43.1@95.885,27.686 96.825,26.746 96.825,25.425 96.988,25.262 96.988,23.989 v1@96.037,23.038 ; v1(102.083,35.484) 102.362,35.204 104.168,35.204 105.209,36.246 109.8,36.246 109.979,36.424 109.979,36.426 111.547,37.995 111.547,38.019 111.762,38.233 111.786,38.233 111.86,38.307 U1.J1@111.86,38.319 ; U1.J1@111.908,38.367 U1.J1@111.914,38.367
  Top Layer w0.381: P14.4@53.34,3.81 P2.2@53.34,6.155 v1(53.34,7.62) P2.2@53.34,9.085
  Mid-Layer 2 w0.152: v1(53.34,7.62) 54.788,9.068 64.1,9.068 64.415,8.753 69.038,8.753 72.147,11.862 73.33,11.862 88.671,11.862 95.766,18.957 95.766,22.818 v1(96.012,23.063) ; v1@96.041,23.034 96.612,23.606 96.612,23.853 97.203,24.444 97.203,25.017 97.206,25.019 97.206,27.341 97.968,28.103 97.968,30.405 102.083,34.52 v1(102.083,35.484)
  Bottom Layer w0.381: P8.2@53.34,6.155 v1(53.34,7.62) P8.2@53.34,9.085
P0.05/AIN3: P6.3 P12.3 P17.6 SB51.1 U1.K2 | length 93.4
  Top Layer w0.203: v1@72.8,18.075 v1@72.857,18.018 ; v1(72.9,18.075) 72.947,18.028 72.947,17.744 73.016,17.675 73.213,17.675 73.287,17.675
  Top Layer w0.381: P6.3@81.28,54.661 v1(81.28,55.88) P6.3@81.28,57.345 P17.6@81.28,59.69
  Mid-Layer 1 w0.152: v1@100.432,37.694 102.417,37.694 103.865,36.246 109.8,36.246 111.672,38.117 v2(112.414,38.117)
  Mid-Layer 2 w0.152: v1(72.9,18.075) 72.91,18.085 72.91,21.083 72.796,21.197 72.796,37.498 72.669,37.625 72.669,38.042 75.692,41.065 75.692,49.936 81.28,55.524 v1(81.28,55.88)
  Bottom Layer w0.152: v1(72.669,37.719) 72.771,37.617 78.486,37.617 80.289,35.814 85.227,35.814 86.091,36.678 87.655,36.678 88.214,36.119 98.026,36.119 99.626,37.719 v1(100.406,37.719)
  Bottom Layer w0.381: P12.3@81.28,54.415 v1(81.28,55.88) P12.3@81.28,57.345
P0.06: P6.4 P12.4 P17.8 SB53.1 U1.L1 | length 91.5
  Top Layer w0.15: 109.804,35.941 109.925,35.941 110.282,36.299 110.282,36.3 111.85,37.867 U1.L1@111.914,37.867
  Top Layer w0.152: v1(99.847,37.186) 100.627,37.186 101.244,36.568 101.244,35.33 101.675,34.9 104.294,34.9 105.335,35.941 109.804,35.941
  Top Layer w0.203: v1(72.459,20.897) 72.459,21.288 SB53.1@72.459,21.641
  Top Layer w0.381: P6.4@78.74,54.415 v1(78.74,55.88) P6.4@78.74,57.345 P17.8@78.74,59.69
  Mid-Layer 2 w0.152: v1(72.459,20.897) 72.492,20.93 72.492,36.805 v1(72.136,37.16) 72.136,37.94 75.387,41.191 75.387,50.063 78.74,53.415 v1(78.74,55.88)
  Bottom Layer w0.152: v1(72.136,37.16) 73.339,37.16 73.491,37.313 78.351,37.313 80.155,35.509 85.353,35.509 86.217,36.373 87.529,36.373 88.088,35.814 98.153,35.814 99.524,37.186 v1(99.847,37.186)
  Bottom Layer w0.381: P12.4@78.74,54.415 v1(78.74,55.88) P12.4@78.74,57.345
P0.07: P6.5 P12.5 P17.10 P25.12 U1.M2 U8.1 | length 92.9
  Top Layer w0.152: P25.12@78.74,34.245 v1(78.74,36.17) ; U8.1@92.773,23.022 93.99,23.022 94.743,23.774 v1(94.844,23.774)
  Top Layer w0.381: P6.5@76.2,54.61 v1(76.2,55.88) P6.5@76.2,57.345 P17.10@76.2,59.69
  Mid-Layer 1 w0.152: v1(100.406,36.652) 103.031,36.652 103.742,35.941 109.927,35.941 111.603,37.617 v2(112.414,37.617)
  Mid-Layer 2 w0.152: v1(71.603,36.601) 71.603,37.897 75.082,41.377 75.082,50.189 76.2,51.306 v1(76.2,55.88) ; v1(94.844,23.774) 94.844,24.544 95.987,25.687 95.987,27.846 96.749,28.608 96.749,30.91 99.009,33.171 99.009,36.035 99.626,36.652 v1(100.406,36.652)
  Bottom Layer w0.152: v1(71.603,36.601) 73.211,36.601 73.618,37.008 77.579,37.008 79.382,35.204 85.479,35.204 86.343,36.068 87.403,36.068 87.962,35.509 98.279,35.509 99.422,36.652 v1(100.406,36.652)
  Bottom Layer w0.381: P12.5@76.2,54.415 v1(76.2,55.88) P12.5@76.2,57.345
P0.08: P6.6 P12.6 P17.12 SB52.1 U1.N1 | length 93.5
  Top Layer w0.15: 110.082,35.636 111.814,37.367 U1.N1@111.914,37.367
  Top Layer w0.152: v1(71.653,22.784) 71.884,23.014 74.7,23.014 74.999,22.716 74.999,21.463 ; v1(99.847,36.119) 100.627,36.119 100.94,35.806 100.94,35.204 101.548,34.595 104.42,34.595 105.462,35.636 110.082,35.636
  Top Layer w0.381: P6.6@73.66,54.712 v1(73.66,55.88) P6.6@73.66,57.345 P17.12@73.66,59.69
  Mid-Layer 2 w0.152: v1(71.653,22.784) 72.187,23.317 72.187,34.925 v1(71.069,36.043) 71.069,37.794 74.778,41.503 74.778,50.19 73.66,51.308 v1(73.66,55.88)
  Bottom Layer w0.152: v1(71.069,36.043) 73.083,36.043 73.744,36.703 77.452,36.703 79.256,34.9 85.606,34.9 86.469,35.763 87.277,35.763 87.835,35.204 98.405,35.204 99.319,36.119 v1(99.847,36.119)
  Bottom Layer w0.381: P12.6@73.66,54.415 v1(73.66,55.88) P12.6@73.66,57.345
P0.09/NFC1: R43.2 R44.2 U1.L24 | length 19.6
  Top Layer w0.25: U1.L24@118.414,37.867 118.569,37.867 118.569,37.782 118.655,37.782 120.125,36.311 122.585,36.311 124.699,34.197 124.699,24.33 R43.2@124.169,23.8 124.206,23.762 R44.2@124.206,22.725
P0.10/NFC2: R45.2 R46.2 U1.J24 | length 20
  Top Layer w0.25: U1.J24@118.414,38.367 118.638,38.367 120.292,36.714 122.751,36.714 123.484,35.981 123.484,35.971 125.101,34.354 125.101,23.95 R45.2@125.251,23.8 ; R46.2@125.197,22.725 R45.2@125.197,23.745
P0.11: P24.1 P25.18 U1.T2 U8.5 | length 84.7
  Top Layer w0.152: v1(74.905,35.865) 74.93,35.839 P25.18@74.93,34.245 ; U8.5@92.548,24.847 94.437,24.847 94.976,24.308 95.402,24.308 v1(95.453,24.257) ; P24.1@93.027,53.34 94.272,54.585 v1(97.384,54.585)
  Mid-Layer 1 w0.152: v1(100.406,34.519) 102.84,34.519 103.653,35.331 110.179,35.331 111.465,36.617 v2(112.414,36.617)
  Mid-Layer 2 w0.152: v1(95.453,24.257) 95.453,24.714 96.291,25.552 96.291,27.72 97.053,28.482 97.053,30.784 99.314,33.045 99.314,34.206 99.626,34.519 v1(100.406,34.519) 100.937,35.05 100.937,35.945 101.448,36.455 101.448,44.547 100.99,45.004 100.99,46.627 100.838,46.78 100.838,52.426 99.34,53.924 97.925,53.924 97.384,54.465 v1(97.384,54.585)
  Bottom Layer w0.152: v1(74.905,35.865) 75.133,36.093 77.2,36.093 79.003,34.29 98.784,34.29 99.012,34.519 v1(100.406,34.519)
P0.12: P24.2 P25.16 U1.U1 U8.9 | length 82.8
  Top Layer w0.15: 110.16,35.027 110.315,35.027 111.656,36.367 U1.U1@111.914,36.367
  Top Layer w0.152: v1(76.2,32.461) P25.16@76.2,34.245 ; v2(90.475,24.257) 90.51,24.222 U8.9@91.123,24.222 ; P24.2@97.472,53.34 97.472,53.784 v1(98.146,54.458) ; v1(99.847,33.985) 104.673,33.985 105.714,35.027 110.16,35.027
  Mid-Layer 1 w0.152: v2(90.475,24.257) 90.475,24.97 90.73,25.226 94.213,25.226 94.648,24.79 95.961,24.79 v1(96.164,24.587)
  Mid-Layer 2 w0.152: v1@96.139,24.587 96.139,24.969 96.596,25.426 96.596,27.594 97.358,28.356 97.358,30.658 99.847,33.147 v1(99.847,33.985) 100.686,33.985 101.24,34.539 101.24,35.819 101.752,36.332 101.752,44.673 101.295,45.13 101.295,46.754 101.143,46.906 101.143,52.553 99.238,54.458 v1(98.146,54.458)
  Bottom Layer w0.152: v1(76.2,32.461) 77.724,33.985 v1(99.847,33.985)
P0.13: P24.3 SB5.1 U1.AD8 | length 86
  Top Layer w0.152: P24.3@93.497,50.8 94.285,50.8 95.402,49.682 102.718,49.682 ; v2(102.718,51.486) 102.718,49.682 ; v1(104.267,44.958) 104.046,45.179 104.046,48.354 102.718,49.682 ; U1.AD8@113.914,34.367 113.914,34.295 v2(114.63,33.579) ; SB5.1@122.139,54.197 123.952,52.384 123.952,49.124 v2(124.181,48.895)
  Mid-Layer 1 w0.152: v2(102.718,51.486) 102.718,52.299 103.226,52.807 104.8,52.807 105.994,51.613 114.99,51.613 117.944,48.659 122.522,48.659 122.778,48.915 124.16,48.915 v2(124.181,48.895) ; v2(114.63,33.579) 115.102,33.579 116.03,32.651 116.578,32.651 117.041,32.188 117.041,30.427 116.992,30.378 v1(116.992,29.87)
  Mid-Layer 2 w0.152: v1(103.276,29.032) 103.607,29.032 105.022,30.447 105.022,36.597 106.017,37.592 106.017,43.2 104.267,44.95 v1(104.267,44.958)
  Bottom Layer w0.152: v1(103.276,29.032) 103.97,29.032 104.211,28.792 110.022,28.792 110.402,29.171 110.419,29.171 110.882,29.635 116.757,29.635 v1(116.992,29.87)
P0.14: P24.4 SB6.1 U1.AC9 | length 84.1
  Top Layer w0.152: P24.4@97.472,50.8 101.461,50.8 102.553,51.892 v2(103.149,51.892) 103.353,51.689 103.353,49.468 104.572,48.249 v1(104.572,45.669) ; SB6.1@122.139,52.774 123.647,51.266 123.647,48.666 v2(123.8,48.514)
  Mid-Layer 1 w0.152: v2(103.149,51.892) 103.149,52.299 103.352,52.502 104.674,52.502 105.868,51.308 114.867,51.308 117.818,48.357 122.647,48.357 122.825,48.534 123.779,48.534 v2(123.8,48.514) ; v2(114.164,34.867) 114.164,34.8 114.512,34.451 114.512,34.201 114.747,33.966 115.142,33.966 116.155,32.953 116.703,32.953 117.343,32.313 117.343,30.699 117.704,30.338 v1(117.704,29.566)
  Mid-Layer 2 w0.152: v1(102.54,28.829) 102.868,28.501 103.507,28.501 104.978,29.972 104.978,29.976 105.324,30.322 105.324,36.471 106.32,37.467 106.32,43.921 v1(104.572,45.669)
  Bottom Layer w0.152: v1(102.54,28.829) 102.88,28.489 110.164,28.489 111.008,29.333 117.471,29.333 v1(117.704,29.566)
P0.15: P24.5 SB7.1 U1.AD10 | length 81.9
  Top Layer w0.152: P24.5@93.027,48.26 94.285,48.26 95.402,49.378 99.314,49.378 103.734,44.958 103.734,44.737 104.267,44.204 v1(104.267,44.196) 105.207,45.136 105.207,48.034 103.657,49.584 v2(103.657,52.095) ; U1.AD10@114.414,34.367 114.414,34.3 114.747,33.966 114.81,33.966 115.062,33.714 115.062,33.435 114.91,33.282 v2(114.91,33.147) ; SB7.1@122.139,51.352 123.342,50.149 123.342,48.209 v2(123.419,48.133)
  Mid-Layer 1 w0.152: v2(103.657,52.095) 104.649,52.095 105.742,51.003 114.744,51.003 117.693,48.054 122.773,48.054 122.871,48.153 123.398,48.153 v2(123.419,48.133) ; v2(114.91,33.147) 115.106,33.147 115.905,32.348 116.452,32.348 116.738,32.063 116.738,31.115 v1(116.434,30.81)
  Mid-Layer 2 w0.152: v1(103.556,30.302) 104.417,31.163 104.417,42.889 104.041,43.265 104.041,43.705 104.267,43.931 v1(104.267,44.196)
  Bottom Layer w0.152: v1(103.556,30.302) 104.462,29.396 109.772,29.396 110.615,30.24 116.183,30.24 116.434,30.49 v1(116.434,30.81)
P0.16: P24.6 SB8.1 U1.AC11 | length 85.2
  Top Layer w0.152: P24.6@97.472,48.26 100.011,48.26 103.429,44.842 103.429,44.28 104.224,43.485 v1(104.572,43.485) 104.572,43.746 105.504,44.679 105.504,48.158 103.962,49.7 103.962,51.486 v2(104.115,51.638) ; SB8.1@122.139,49.93 123.015,49.054 123.015,47.775 v2(123.038,47.752)
  Mid-Layer 1 w0.152: v2(104.115,51.638) 104.676,51.638 105.615,50.698 114.622,50.698 117.568,47.752 v2(123.038,47.752) ; v2(114.664,34.867) 114.664,34.935 114.997,35.269 117.33,35.269 117.382,35.216 118.128,35.216 118.277,35.067 121.31,32.034 v1(121.31,31.293)
  Mid-Layer 2 w0.152: v1(102.997,29.743) 103.89,29.743 104.719,30.573 104.719,43.337 v1(104.572,43.485)
  Bottom Layer w0.152: v1(102.997,29.743) 103.687,29.743 104.336,29.094 109.897,29.094 110.74,29.937 116.308,29.937 116.772,30.401 119.157,30.401 119.817,31.062 120.3,31.062 120.531,31.293 v1(121.31,31.293)
P0.17: SB13.1 SB23.1 U1.AD12 | length 16.6
  Top Layer w0.203: SB13.1@119.337,21.768 v1(119.634,21.768) 119.957,21.768
  Mid-Layer 1 w0.152: v2(114.914,34.367) 115.169,34.367 116.28,33.256 116.828,33.256 117.646,32.438 117.646,30.824 118.3,30.17 118.3,29.189 117.178,28.067 117.178,26.535 117.935,25.779 117.935,24.901 118.11,24.725 v1(118.11,23.647)
  Bottom Layer w0.152: v1(118.11,23.647) 118.11,23.292 v1(119.634,21.768)
P0.18/RESET: P18.10 P24.8 P25.10 SB42.2 SB44.2 SB45.2 SB56.1 U1.AC13 | length 124.3
  Top Layer w0.152: v1(62.272,25.155) 61.517,25.155 61.199,25.473 61.199,25.915 61.512,26.227 62.395,26.227 63.678,24.945 76.877,24.945 76.963,24.858 78.878,24.858 P18.10@80.01,25.99 80.01,26.717 81.94,28.647 81.94,32.41 81.534,32.816 80.645,32.816 80.01,33.452 P25.10@80.01,34.245 ; 86.589,20.683 86.668,20.683 87.884,20.683 ; v1(88.849,22.581) 87.884,21.615 87.884,20.683 ; 89.1,20.683 87.884,20.683 ; 89.408,20.683 89.716,20.683 ; v1(96.926,47.015) 97.472,46.469 P24.8@97.472,45.72 ; v1(105.918,24.003) 105.918,25.044 107.544,26.67 117.526,26.67 v2(117.627,26.772)
  Top Layer w0.203: 57.396,19.916 SB56.1@57.396,20.269
  Mid-Layer 1 w0.152: v2(115.164,34.867) 115.164,34.8 116.406,33.558 116.954,33.558 117.948,32.564 117.948,30.949 118.602,30.295 118.602,29.063 117.48,27.941 117.48,26.919 v2(117.627,26.772)
  Mid-Layer 2 w0.152: v1(94.869,25.324) 94.869,25.658 95.682,26.471 95.682,38.516 96.52,39.354 96.52,43.942 96.926,44.348 v1(96.926,47.015)
  Bottom Layer w0.152: v1@57.389,19.583 v1(57.389,19.658) 58.467,19.658 62.272,23.463 v1(62.272,25.155) ; v1(78.994,25.197) 79.934,24.257 84.01,24.257 86.322,21.946 87.856,21.946 88.67,22.76 ; v1(88.849,22.581) 88.67,22.76 ; v1(94.869,25.324) 94.64,25.552 93.539,25.552 92.774,24.787 90.697,24.787 88.67,22.76 ; v1@94.869,25.552 95.95,25.552 96.964,24.539 105.382,24.539 v1(105.918,24.003)
P0.19: SB11.1 SB21.1 U1.AC15 | length 28.7
  Top Layer w0.152: v1(105.004,24.003) 105.004,24.562 107.417,26.975 117.263,26.975 117.504,27.216 v2(117.881,27.216)
  Top Layer w0.203: 107.881,24.308 108.056,24.308 v1(108.204,24.308) SB11.1@108.501,24.308
  Mid-Layer 1 w0.152: v2(115.664,34.867) 115.664,34.8 116.603,33.86 117.079,33.86 118.25,32.689 118.25,31.074 118.905,30.42 118.905,28.938 117.991,28.024 117.991,27.325 v2(117.881,27.216)
  Bottom Layer w0.152: v1(105.004,24.003) 105.122,24.003 105.783,23.343 107.239,23.343 v1(108.204,24.308)
P0.20: SB12.1 SB22.1 U1.AD16 | length 21.3
  Top Layer w0.152: 107.881,25.578 108.204,25.578 ; SB12.1@108.501,25.578 108.204,25.578 ; U1.AD16@115.914,34.367 115.914,34.099 116.792,33.221 116.792,32.004 116.794,32.002 116.794,31.234 119.108,28.92 119.108,26.805 118.669,26.365 108.41,26.365 108.204,26.16 108.204,25.578
P0.21: SB14.1 SB24.1 U1.AC17 | length 14.9
  Top Layer w0.203: SB14.1@119.337,23.038 v1(119.634,23.038) 119.957,23.038
  Mid-Layer 1 w0.152: v2(116.164,34.867) 116.164,34.8 116.801,34.163 117.204,34.163 118.553,32.814 118.553,31.2 119.207,30.545 119.207,28.813 118.293,27.899 118.293,25.293 118.415,25.171 v1@118.44,25.197
  Bottom Layer w0.152: v1@118.415,25.171 118.415,24.257 v1(119.634,23.038)
  other v1: 118.466,25.171